# Altium PCB CT9042 Main Board.PcbDoc (part 2 of 2)
Units mm, origin at the board's own origin, x right, y up, seen from the top; angles counter-clockwise.
Board outline 242.29 x 155.23 mm, 4 copper layers (Top Layer, Layer 1, Layer 2, Bottom Layer), stack 1.794 mm thick; 436 components, 347 nets, 1449 pads, 165 vias.
Unrouted connection lines stored in the file: 759.
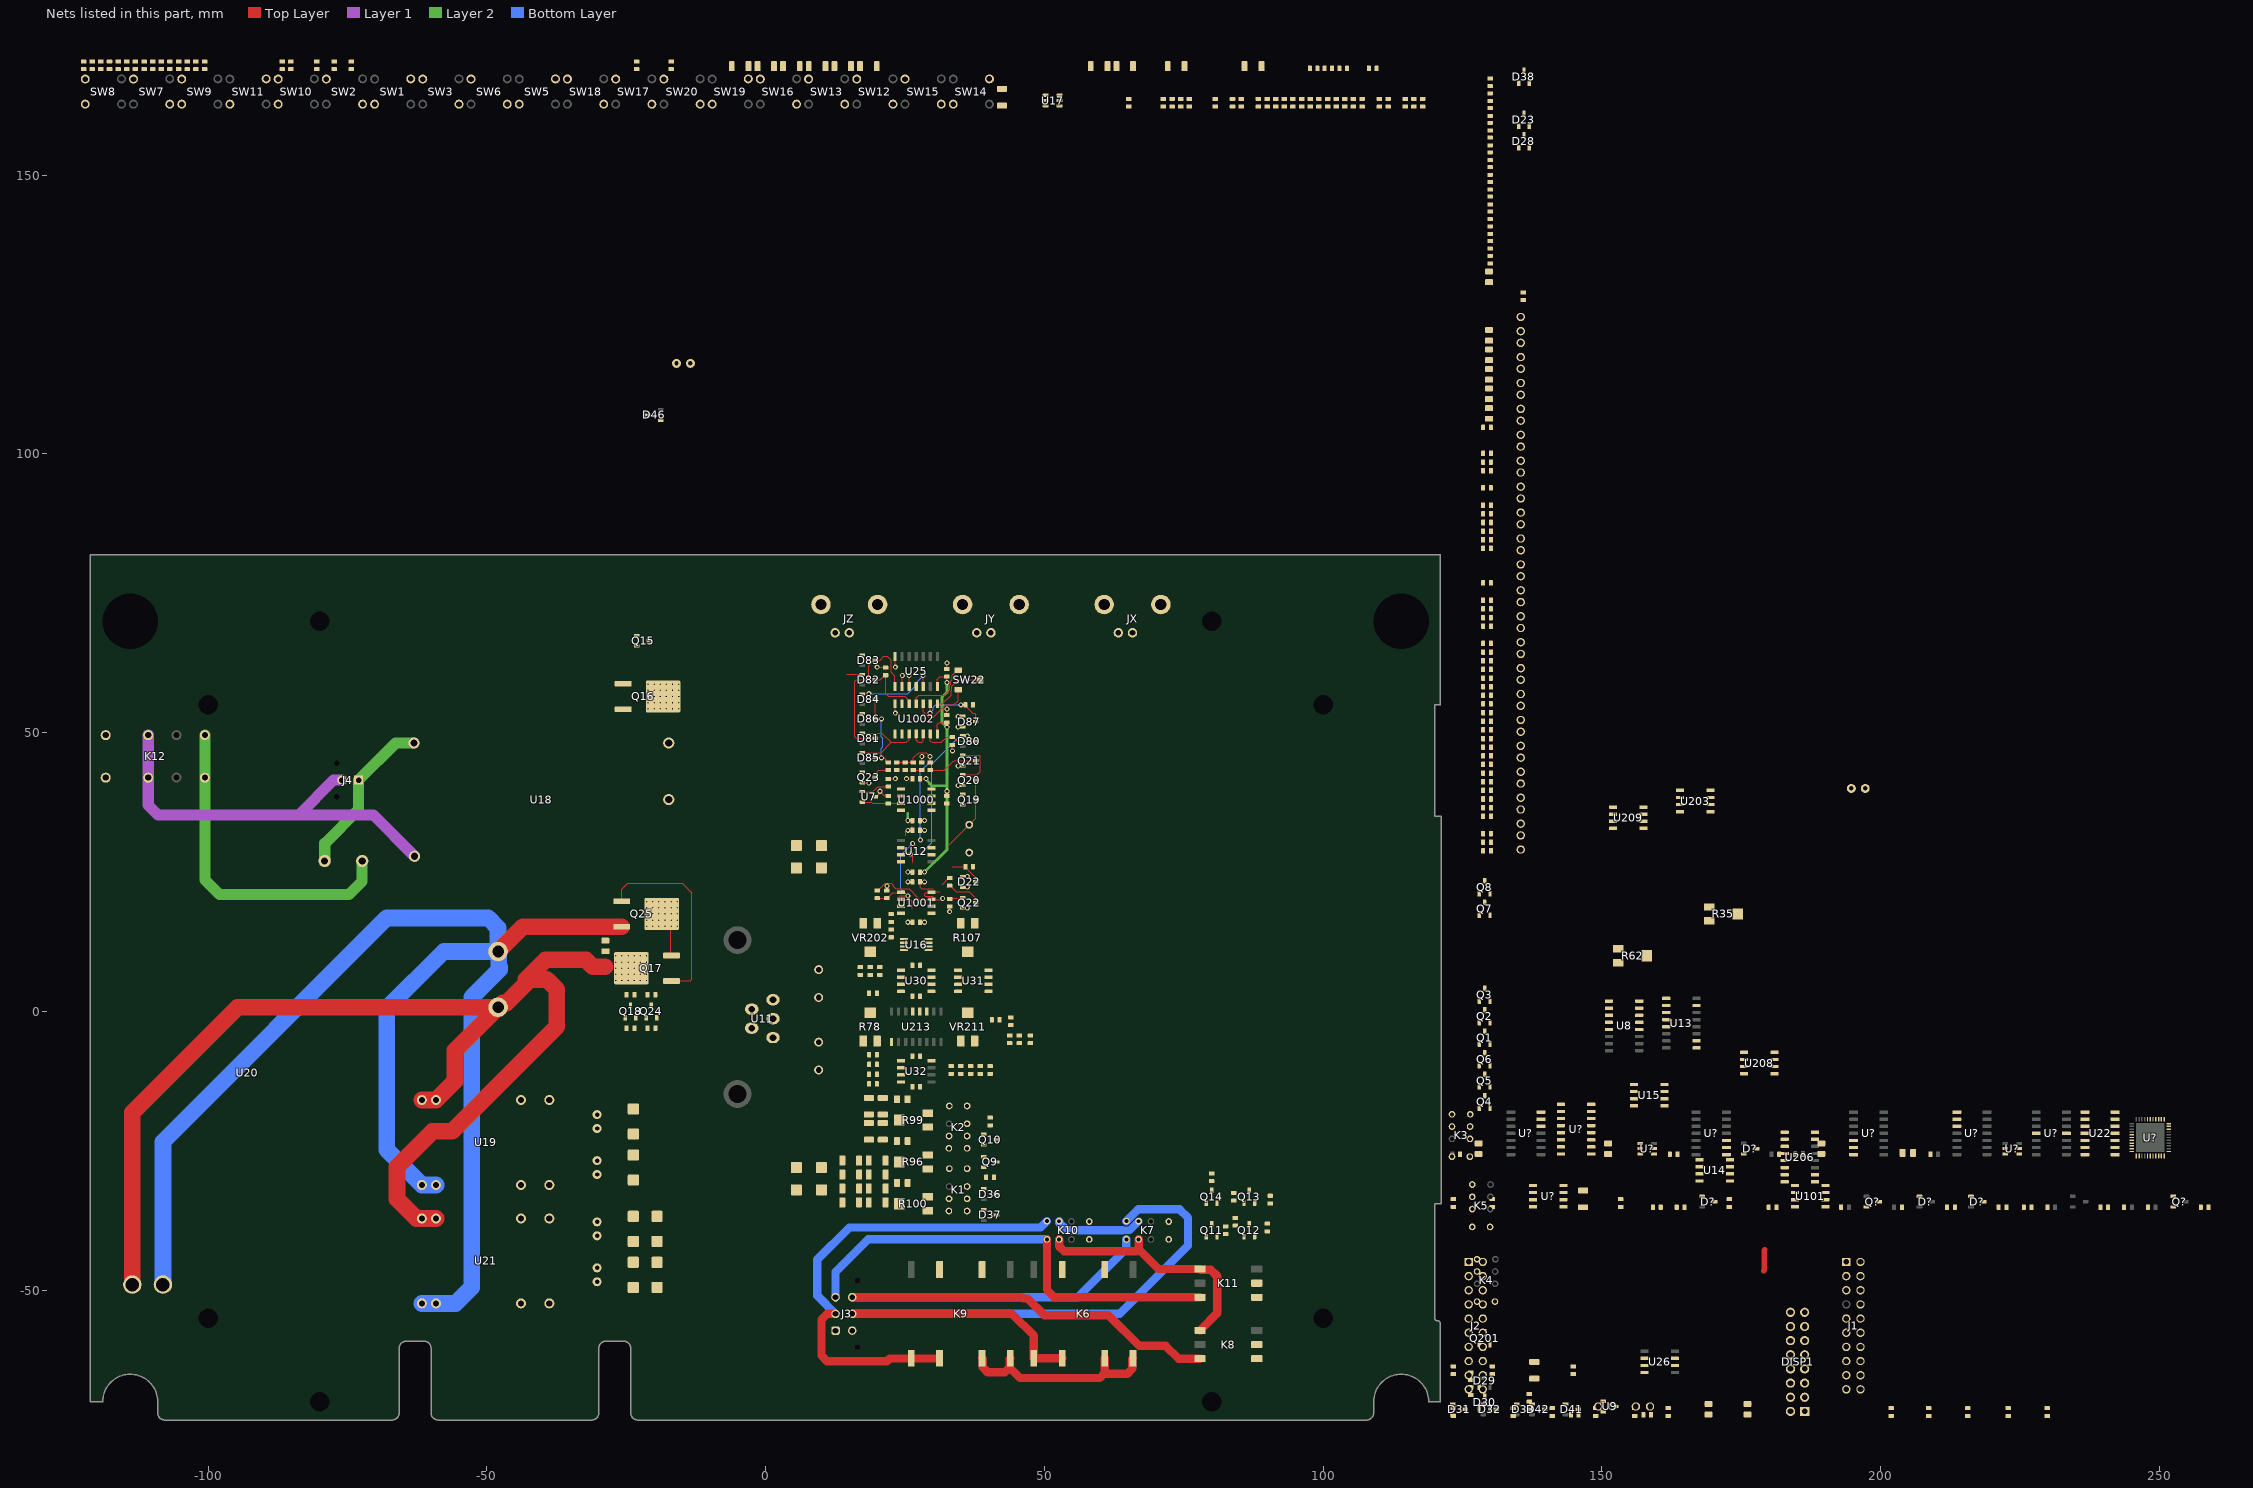
[diagram p4: the nets of this part, all layers, seen from the top]

## Part data (continued)
K8 K11: "RELAY,OPTOMOS,1.5A,100V,AC,IXYS,LCA701S,SMD"
K12: "RELAY,DPDT,5V COIL,250VAC,3A", Manufacturer 1=CIT, Manufacturer Part Number 1=J104B2C5VDC.20S, DIGIKEY=2449-J104B2C5VDC.20S-ND
Q1 Q2 Q4 Q6 Q7 Q8 Q9 Q10 Q11 Q12 Q13 Q14 Q24: library part XSTR-NPN-BC847, "XSTR,NPN,45V,0.1A,,BC847B,SOT23"
Q3 Q5 Q19 Q201 Q? Q?: library part XSTR-PNP-BC857, "XSTR,PNP,SOT23,BC857,SOT23", Manufacturer 1=NEXPERIA, Manufacturer Part Number 1=BC857BW,115, DIGIKEY=1727-4869-1-ND
Q15 Q20 Q21 Q22 Q23: library part XSTR-NMOS-VISHAY-SI2336DS-T1-BE3, "XSTR,NMOS,30V,4.3A,SI2336DS-T1-BE3.SOT23", Manufacturer 1=VISHAY, Manufacturer Part Number 1=SI2336DS-T1-BE3, Package=SOT23, DIGIKEY=742-SI2336DS-T1-BE3CT-ND, Idmax=4.3A, Vds=30V
Q16 Q25: library part XSTR-PMOS-DIODES-DMP10H400SK3-13, "XSTR,PMOS,100V,5.6A,DMP10H400SK3-13,DPAK", Manufacturer 1=DIODES, Manufacturer Part Number 1=DMP10H400SK3-13, Package=DPAK, Idmax=9A, Vds=100V
Q17: library part XSTR-NMOS-DIODES-DMN10H170SK3-13, "XSTR,NMOS,100V,12A,DMN10H170SK3-13,DPAK", Manufacturer 1=DIODES, Manufacturer Part Number 1=DMN10H170SK3-13, Package=DPAK, Idmax=5.6, Vds=100V
Q18: library part XSTR-PNP-BC857, "XSTR,PNP,SOT23,BC857,SOT23"
R1 R2 R3 R4 R5 R29 R30 R157 R158 R159 R160 R164: library part RESC-0603-10K-1%-1/10W, "RESISTOR,10K,1%,100mW,0603 (1608)", LCSC=C25804, Manufacturer 1=YAGEO, Manufacturer Part Number 1=RC0603FR-0710KL, Power=1/10W, Tolerance=1%, MOUSER=603-RC0603FR-0710KL
R6 R162 R163: library part RESC-0805-GENERIC, "RESISTOR,GENERIC,0805"
R7: library part RESC-0603-1K-1%-1/10W, "RESISTOR,1K,1%,100mW,0603 (1608)", LCSC=C21190, Manufacturer 1=YAGEO, Manufacturer Part Number 1=RC0603FR-071KL, Power=1/10W, Tolerance=1%, MOUSER=603-RC0603FR-071KL
R8 R9 R10 R11 R12 R13 R14 R15 R16 R17 R18 R19 R20 R21 R22 R23 R24 R25 R26 R27 R28 R161 R165 R166: library part RESC-0603-470R-1%-1/10W, "RESISTOR,470R,1%,100mW,0603 (1608)", LCSC=C23179, Power=1/10W, Tolerance=1%
R31 R118 R149: library part RESC-0603-511R-0.1%, "RESISTOR,511R,0.1%,100mW,0603 (1608)", Power=1/10W, Tolerance=0.1%
R32 R37 R43 R69 R72 R77 R106 R108: library part RESC-0603-2K05-0.1%-1/10W, "RESISTOR,2K05,0.11%,100mW,0603 (1608)", Power=1/10W, Tolerance=0.1%
R33: library part RESC-0603-50K-0.1%-1/10W, "RESISTOR,50K,0.1%,100mW,0603 (1608)", Power=1/10W, Tolerance=0.1%
R34: library part RESC-0603-2K37-0.1%-1/10W, "RESISTOR,2K37,0.1%,100mW,0603 (1608)", Power=1/10W, Tolerance=0.1%
R35 R62: "RESISTOR,MULTITURN,VERTICAL,5T,500R", Manufacturer 1=BOURNS, Manufacturer Part Number 1=3214X-1-501E
R36 R44 R207: library part RESC-1206-1K-0.1%-1/2W, "RESISTOR,1K,1206,0.1%,520mW,1206", Manufacturer 1=VISHAY, Manufacturer Part Number 1=TNPW12061K00BEEA, Power=0.52W, Tolerance=0.1%
R38 R45 R314: library part RESC-0603-1K27-0.1%-1/10W, "RESISTOR,1K27,0.1%,100mW,0603 (1608)", Power=1/10W, Tolerance=0.1%
R39 R42 R51 R58 R60 R61 R67 R68 R70 R71 R76 R101 R102 R110 R138 R139 R140 R141 R142 R144 R145 R146 R147 R148 R154 R155 R242 R243: library part RESC-0603-10K-0.1%-1/10W, "RESISTOR,10K,0.1%,100mW,0603 (1608)", Manufacturer 1=PANASONIC, Manufacturer Part Number 1=ERA-3AEB103V, Power=1/10W, Tolerance=0.1%, DIGIKEY=P10KDBCT-ND
R40 R112: library part RESC-0603-9K09-0.1%-1/10W, "RESISTOR,9K09,0.1%,100mW,0603 (1608)", Power=1/10W, Tolerance=0.1%
R41 R119 R122 R126 R128: library part RESC-0603-511R-0.1%-1/10W, "RESISTOR,511R,0.1%,100mW,0603 (1608)", Power=1/10W, Tolerance=0.1%
R46 R74 R75 R111 R114: library part RESC-0603-2K49-0.1%-1/10W, "RESISTOR,2K49,0.1%,100mW,0603 (1608)", Power=1/10W, Tolerance=0.1%
R47 R52: library part RESC-1206-18K-0.1%-1/2W, "RESISTOR,18K,1206,0.1%,520mW,1206", Manufacturer 1=VISHAY, Manufacturer Part Number 1=TNPW1206220RBEEA, Power=0.52W, Tolerance=0.1%
R48 R53 R82 R87: library part RESC-1206-1K8-0.1%-1/2W, "RESISTOR,1K8,1206,0.1%,520mW,1206", Manufacturer 1=VISHAY, Manufacturer Part Number 1=TNPW12061K80BEEA, Power=0.52W, Tolerance=0.1%
R49 R54: library part RESC-1206-200R-0.1%-1/2W, "RESISTOR,200R,1206,0.1%,520mW,1206", Manufacturer 1=VISHAY, Manufacturer Part Number 1=TNPW1206200RBEEA, Power=0.52W, Tolerance=0.1%
R50 R55 R81 R86 R113 R115: library part RESC-0603-2K21-0.1%-1/10W, "RESISTOR,2K21,0.1%,100mW,0603 (1608)", Power=1/10W, Tolerance=0.1%
R56 R57: library part RESC-1206-220R-0.1%-1/2W, "RESISTOR,220R,1206,0.1%,520mW,1206", Manufacturer 1=VISHAY, Manufacturer Part Number 1=TNPW1206220RBEEA, Power=0.52W, Tolerance=0.1%
R59 R66 R73 R121 R123 R129 R130 R135 R257: library part RESC-0603-1K-0.1%-1/10W, "RESISTOR,1K,0.1%,100mW,0603 (1608)", Power=1/10W, Tolerance=0.1%
R63 R79 R316: library part RESC-0603-2M74-0.1%-1/10W, "RESISTOR,2M74,0.1%,100mW,0603 (1608)", Power=1/10W, Tolerance=0.1%
R64 R117 R241 R271: library part RESC-0603-4M75-1%-1/10W, "RESISTOR,4M75,0.1%,100mW,0603 (1608)", Power=1/10W, Tolerance=0.1%
R65: library part RESC-0603-4K42-0.1%-1/10W, "RESISTOR,4K42,0.1%,100mW,0603 (1608)", Power=1/10W, Tolerance=0.1
R78 R107 VR211: "RESISTOR,MULTITURN,VERTICAL,5T,10K", Manufacturer 1=BOURNS, Manufacturer Part Number 1=3214X-1-102E
R80 R103: library part RESC-0603-44K2-0.1%-1/10W, "RESISTOR,44K2,0.1%,100mW,0603 (1608)", Power=1/10W, Tolerance=0.1%
R83 R88: library part RESC-1206-180R-0.1%-1/2W, "RESISTOR,180,1206,0.1%,520mW,1206", Manufacturer 1=VISHAY, Manufacturer Part Number 1=TNPW1206180RBEEA, Power=0.52W, Tolerance=0.1%
R84 R85 R89 R90 R91 R92 R97 R98: library part RESC-1206-20R-0.1%-1/2W, "RESISTOR,20R,1206,0.1%,520mW,1206", Manufacturer 1=VISHAY, Manufacturer Part Number 1=TNPW120620R0BEEA, Power=0.52W, Tolerance=0.1%
R93: library part RESC-0805-2K49-0.1%-1/4W, "RESISTOR,2K49,0.1%,250mW,0805", Manufacturer 1=TE, Manufacturer Part Number 1=RP73PF2A2K49BTDF, Power=1/4W, Tolerance=0.1%
R94 R95: library part RESC-0805-1K54-0.1%-1/4W, "RESISTOR,1K54,0.1%,250mW,0805", Manufacturer 1=TE, Manufacturer Part Number 1=RP73PF2A1K54BTDF, Power=1/4W, Tolerance=0.1%
R96 R99 R100: "RESISTOR,MULTITURN,VERTICAL,5T,1K", Manufacturer 1=BOURNS, Manufacturer Part Number 1=3214X-1-102E
R104: library part RESC-0603-511K-0.1%-1/10W, "RESISTOR,511K,0.1%,100mW,0603 (1608)", Power=1/10W, Tolerance=0.1%
R105: library part RESC-0603-1M54-0.1%-1/10W, "RESISTOR,1M54,0.1%,100mW,0603 (1608)", Power=1/10W, Tolerance=0.1
R109: library part RESC-0603-1K01-0.1%-1/10W, "RESISTOR,1K01,0.1%,100mW,0603 (1608)", Power=1/10W, Tolerance=0.1%
R116 R270: library part RESC-0603-100K-0.1%-1/10W, "RESISTOR,100K,0.1%,100mW,0603 (1608)", Power=1/10W, Tolerance=0.1%
R120 R124 R125 R127 R131 R132 R133 R151 R152 R153 R156 R277 R279 R280 R? R? R? R? R? R? R? R? R? R? R? R?: library part RESC-0603-10K-0.1%-1/10W, "RESISTOR,10K,0.1%,100mW,0603 (1608)", Power=1/10W, Tolerance=0.1%
R134 R136: library part RESC-0603-51K1-1%-1/10W, "RESISTOR,51K1,1%,100mW,0603 (1608)", Power=1/10W, Tolerance=1%
R137 R150: library part RESC-1206-1K-0.1%-1/4W, "RESISTOR,1K,1206,0.1%,125mW,1206", Power=1/4W, Tolerance=0.1%
R143: library part RESC-0603-10R-1%-1/10W, "RESISTOR,10R,1%,100mW,0603 (1608)", Power=1/10W, Tolerance=1%
R261: library part RESC-0603-42K2-0.1%-1/10W, "RESISTOR,42K2,0.1%,100mW,0603 (1608)", Power=1/10W, Tolerance=0.1%
SW1 SW2 SW3 SW5 SW6 SW7 SW8 SW9 SW10 SW11 SW12 SW13 SW14 SW15 SW16 SW17 SW18 SW19 SW20: "SW,SMD,TACT,4PIN,TH,160g TOP ACTUATOR FOR CAP,E-SWITCH,TL1105SPF160", Manufacturer 1=E-SWITCH, Manufacturer Part Number 1=TL1105SPF160Q, DIGIKEY=EG1861-ND
SW22: library part SWITCH-NIDEC-CJS-1200TB1, "SWITCH,SPST,SLIDE,SMD", Manufacturer 1=NIDEC, Manufacturer Part Number 1=CJS-1200TB1, DIGIKEY=563-CJS-1200TB1CT-ND
U7 U9: library part IC-TI-ATL431B-SOT23, "IC,REGULATOR,REFERENCE,SHUNT,0.5%,48ppm,TL431,SOT23", Manufacturer 1=TI, Manufacturer Part Number 1=ATL431BIDBZR, DIGIKEY=296-47739-1-ND
U8: library part IC-SILICONIX-DG451, "IC,ANALOG,4XSPST ANALOG SWITCH,NC,,SILICONIX,DG451,SO16", Manufacturer 1="VISHAY SILICONIX", Manufacturer Part Number 1=DG451EY-T1-E3, DIGIKEY=DG451EY-T1-E3CT-ND
U11: library part IC-TI-LM675-TO220-5, "IC,OPAMP,SINGLE,POWER,LM675,TO220-5"
U12: library part IC-TI-TLV7211-SO8, "IC,COMPARATOR,SINGLE,PUSHPULL,TI,TLV7211,SO8", Manufacturer 1=TI, Manufacturer Part Number 1=TLV7211IDR, DIGIKEY=296-21871-1-ND
U13 U206 U213: library part IC-TI-CD4053-SPLIT, "IC,LOGIC,CMOS,4XXX,TRIPLE 2:1 MUX,SPLIT BLOCKS"
U14: library part IC-TI-LM393-SO8, "IC,COMPARATOR,DUAL,LM393,SO8", Manufacturer 1=DIODES-INC, Manufacturer Part Number 1=AS393AMTR-E1, DIGIKEY=AS393AMTR-E1
U15: library part IC-ANALOG-AD633XR-SO8, "IC,ANALOG,MULTIPLIER,ANALOGDEVICES,AD633JRZ,SO8", Manufacturer 1="ANALOG DEVICES", Manufacturer Part Number 1=AD633JRZ, DIGIKEY=505-AD633JRZ-ND
U16: library part IC-MICROCHIP-MCP4551T-103, "IC,DIGITAL POTMETER,257STEP,I2C,10K,MICROCHIP,MCP4551T-103", Manufacturer 1=MICROCHIP, Manufacturer Part Number 1=MCP4551T-103E/MS, DIGIKEY=MCP4551T-103E/MSCT-ND
U17: library part IC-TI-74HC14-SO14, "IC,NOT,HEX,SCHMITTTRIGGER,ONSEMI,MC74AC14DR2G,SO14", Manufacturer 1=ONSEMI, Manufacturer Part Number 1=MC74AC14DR2G, DIGIKEY=MC74AC14DR2GOSCT-ND
U18: library part MODULE-ADAMTECH-AC005-S05, "MOD,AC/DC,ISO,90...264 AC,+5V OUT,1A"
U19: library part MODULE-MEANWELL-DWN06C-05, "MOD,DC/DC,ISO,DC 36...72V IN,+/-5V OUT,1A"
U20: library part MODULE-MEANWELL-IRM-45-48, "MOD,AC/DC,ISO,90...264 AC,+48V OUT,1A"
U21: library part MODULE-MEANWELL-DWN06C-15, "MOD,DC/DC,ISO,DC 36...72V IN,+/-15V OUT,200mA"
U22: library part IC-TI-CD4066-SO14, "IC,ANALOG,4XSPST ANALOG SWITCH,NO,TI,CD4016,SO14", Manufacturer 1=TI, Manufacturer Part Number 1=CD4066BM96, DIGIKEY=296-14475-1-ND
U25: library part IC-TI-CD4013-SO14, "IC,LOGIC,CMOS,4XXX,DUAL D-FLIPFLOP,CD4013", Manufacturer 1=TI, Manufacturer Part Number 1=CD4013BM96, DIGIKEY=296-24347-1-ND
U26: library part IC-TI-TL081-SO8, "IC,OPAMP JFET,SINGLE,TL081HIDR,SO8", Manufacturer 1=TI, Manufacturer Part Number 1=TL081HIDR, MOUSER=595-TL081HIDR
U30 U31 U32 U101 U1000 U1001: library part IC-TI-TL082H-SO8, "IC,OPAMP JFET,DUAL,TL082HIDR,SO8", Manufacturer 1=TI, Manufacturer Part Number 1=TL082HIDR, MOUSER=595-TL082HIDR
U203 U208 U209: library part IC-TI-LF412-S08, "IC,OPAMP JFET,DUAL,LF412,SO8"
U1002: library part IC-DIODES-74LVC14AS14-13-SO14, "IC,LOGIC,CMOS,74XX,HEX SCHMITTTRIGGER,74LVC14AS14-13,SO14", Manufacturer 1=DIODES, Manufacturer Part Number 1=74LVC14AS14-13, DIGIKEY=74LVC14AS14-13DICT-ND
U?: library part IC-WCH-CH340B, "IC,XCVR,USB UART WITH XTAL AND EEPROM,WCH,CH340G-SO16", Manufacturer 1=WCH, Manufacturer Part Number 1=FT231XS-R, MOUSER=CH340B
U? U? U? U? U?: library part IC-TI-TL084-SO14, "IC,OPAMP JFET,QUAD,TL084HIDR,SO14", Manufacturer 1=TI, Manufacturer Part Number 1=TL082HIDR, MOUSER=595-TL082HIDR
U? U?: library part IC-TI-SN74LVC1G3157DBVR, "IC,ANALOG,SPDT ANALOG SWITCH,SINGLEGATE,TI,SN74LVC1G3157DBVR,SOT23-6", Manufacturer 1=TI, Manufacturer Part Number 1=SN74LVC1G3157DBVR, DIGIKEY=296-14908-1-ND
U?: library part IC-SILICONIX-DG470EY-T1-E3-SO8, "IC,ANALOG,SPDT ANALOG SWITCH,SILICONIX,DG470EY-T1-E3,SO8", Manufacturer 1=VSHIAY, Manufacturer Part Number 1=DG470EY-T1-E3, DIGIKEY=DG470EY-T1-E3CT-ND
U?: library part IC-ATMEL-ATMEGA4809-QFP48, "IC,CPU,ATMEGA4809,QFP48"
VR202: "RESISTOR,MULTITURN,VERTICAL,5T,100K", Manufacturer 1=BOURNS, Manufacturer Part Number 1=3214X-1-102E

## Free pads (board coordinates)
  round 0 hole 10 unplated: 1(-114,70) 1(114,70)
  round 0 hole 3.5 unplated: 1(-100,55) 1(-100,-55) 1(-80,70) 1(-80,-70) 1(80,70) 1(80,-70) 1(100,55) 1(100,-55)

## Via types
v1: diameter 0.508/0.508/0.508/0.6 (per signal layer), hole 0.254, Top Layer to Bottom Layer, 90 vias
v2: diameter 0.9, hole 0.5, Top Layer to Bottom Layer, tented top, 50 vias
v3: diameter 0.5, hole 0.2, Top Layer to Bottom Layer, 25 vias

## Nets (pads, with @x,y where several pads share a name; then routed paths per layer and width w, separated by ;. In a path a pad name is that pad's centre, name@x,y a point inside that pad or via, vN(x,y) a via of type N, cw(c..) or ccw(c..) an arc to the next point about the centre after c; other vN are vias at no path point)
A\/B: U17.3
ADC-D0: U?.19
ADC-D1: U?.18
ADC-D2: U?.17
ADC-D3: U?.16@247.869,-25.915
ADC-D4: U?.13@246.369,-25.915
ADC-D5: U?.12@245.869,-25.915
ADC-D6: U?.11@245.069,-25.115
ADC-D7: U206.9 U?.10@245.069,-24.615
ADC-IBG: D29.3 R59.1
ADC-ICD: U13.4 U14.6 U15.1 U101.3
ADC-VBG: R73.1 R76.1
ADC-VCD: R243.1 U15.7 U30.1 U30.3 U213.3
AGND: C26.2 C28.1 C33.2 C38.2 C42.2 C44.2 C47.1 C48.2 C52.1 C56.2 C60.1 C68.2 C69.2 C70.2 C71.1 C72.2 C73.2 C74.2 C75.2 C76.1 C77.2 C78.2 C79.2 C80.1 C81.2 C83.1 C84.1 D60.2 D63.1 D70.2 D73.1 D87.1 J3.1 J3.4 JX.2 JX.3 JX.4 JY.2 JY.3 JY.4 JZ.2 JZ.3 JZ.4 K5.7 Q3.3 Q4.3 Q11.2 Q12.2 Q13.2 Q14.2 Q15.2 Q17.3 Q20.2 Q21.2 Q22.2 Q23.2 Q25.4 R63.2 R64.2 R76.2 R110.2 R112.2 R120.1 R124.2 R131.2 R140.2 R144.2 R145.2 R147.1 R153.2 R280.2 R?.1@159.179,-35.115 R?.1@163.429,-35.115 R?.1@229.929,-35.115 R?.1@247.929,-35.115 U7.3 U8.3 U8.14 U13.2 U15.2 U15.8 U16.1 U16.4 U16.7 U18.4 U19.9 U19.16 U21.9 U21.16 U25.7 U25.9 U25.10 U31.3 U31.5 U208.3 U208.5 U209.5 U1002.7 U?.3@137.644,-33.75 | length 36
  Top Layer w0.2: Q25.4@-18.66,17.495 -17.067,15.902 -17.067,10.192 Q17.3@-16.91,10.035 ; Q23.2@17.35,41.05 17.375,41.025 18.475,41.025 v2(18.5,41) ; U7.3@19.65,38.5 19.85,38.5 20.366,39.016 20.366,39.366 v2(20.5,39.5) 21.31,38.69 C33.2@22,38.69 ; v2(20,61.75) 20.03,61.72 21.47,61.72 R145.2@21.5,61.69 ; R110.2@21.75,21.69 v2(21.75,22.5) ; U1002.7@23.19,55.2 23.22,55.17 23.22,53.53 v2(23.25,53.5) ; U25.7@23.19,63.7 23.22,63.67 23.22,61.78 v2(23.25,61.75) ; U25.9@24.46,58.3 24.48,58.32 24.48,60.23 v2(24.5,60.25) ; v2(25.25,41.75) C77.2@26.31,41.75 ; v2(25.5,23.25) C74.2@26.31,23.25 ; v2(25.5,25) C73.2@26.31,25 ; U25.10@25.73,58.3 25.74,58.31 25.74,60.24 v2(25.75,60.25) ; C76.1@27.69,16 v2(28.5,16) ; C75.2@27.69,32.5 v2(28.5,32.5) ; C80.1@27.69,34.25 v2(28.5,34.25) ; R144.2@28,44.69 v2(28,45.75) ; C79.2@32.5,53.19 v2(32.5,54.25) ; C78.2@32.5,61.44 v2(32.5,62.5) ; v2(33,17.89) R147.1@33,18.7 ; v2(33.5,46.75) R140.2@33.5,47.81 ; v2(34.54,40.55) Q20.2@35.35,40.55 ; v2(34.54,44.05) Q21.2@35.35,44.05 ; v2(34.54,52.95) D87.1@35.35,52.95 ; Q22.2@35.35,18.55 v2(36.16,18.55)
  other v1: -21.365,15.295 -20.265,15.295 -19.165,15.295 -18.065,15.295 -16.965,15.295 -15.865,15.295 -21.365,16.395 -20.265,16.395 -19.165,16.395 -18.065,16.395 -16.965,16.395 -15.865,16.395 -21.365,17.495 -20.265,17.495 -19.165,17.495 -18.065,17.495 -16.965,17.495 -15.865,17.495 -21.365,18.595 -20.265,18.595 -19.165,18.595 -18.065,18.595 -16.965,18.595 -15.865,18.595 -21.365,19.695 -20.265,19.695 -19.165,19.695 -18.065,19.695 -16.965,19.695 -15.865,19.695
ANA-IB: U22.2
ANA-IC: U22.9
ANA-VB: U22.3
ANA-VC: U22.10
BEAMFIND: Q23.1
BFA: R69.1 U8.1 U8.16
BLANK: JZ.1 R149.2
BTN-ALTERNATE: SW11.1
BTN-BIPFET: SW7.3
BTN-CHA: SW5.1
BTN-CHB: SW6.2
BTN-DUTAB: SW20.3
BTN-IMAXDN: SW15.2
BTN-IMAXUP: SW8.1
BTN-MARK12: SW2.3
BTN-NPN-PNP: SW12.3
BTN-PAGE: SW1.1
BTN-PMAXDN: SW17.2
BTN-PMAXUP: SW10.1
BTN-ROTCLICK: R164.1
BTN-RUNSTOP: SW18.2
BTN-SETUP: SW14.4
BTN-TRCNT: SW13.3
BTN-TRSEL: SW19.1
BTN-VMAXDN: SW9.1 SW16.2
DISCHARGE: D81.3 D83.3 Q20.1 Q21.1 U25.8 | length 38.1
  Top Layer w0.2: D81.3@19.65,49 16.25,49 16,49.25 16,59.25 16.25,59.5 18.25,59.5 18.5,59.75 18.5,62.05 19.45,63 20.51,63 21.21,63.7 21.79,63.7 22.5,62.99 22.5,60.845 23.19,60.155 U25.8@23.19,58.3 ; Q20.1@35.35,42.45 37.95,42.45 38.5,43 38.5,45.75 38.3,45.95 Q21.1@35.35,45.95
DRIVE: U16.6 U30.2
ENABLE: U17.5
F-KEYINT-A: J1.8 R159.1
F-KEYINT-B: J1.10 R160.1
F-LCD4: DISP1.11 J1.11
F-LCD5: DISP1.12 J1.13
F-LCD6: DISP1.13 J1.15
F-LCD7: DISP1.14 J1.17
F-LCDE: DISP1.6 J1.9
F-LCDRS: DISP1.4 J1.5
F-POWERON: J1.3 SW3.3
F-SCL: J1.4 R29.1
F-SDA: J1.6 R30.1
FGND: C1.2 C2.2 C3.2 C4.2 C5.2 C6.2 C7.2 C8.2 C9.2 DISP1.1 DISP1.5 J1.19 J1.20 Q1.2 R3.2 R5.2 R157.2 R158.2 R161.1 SW1.4 SW2.2 SW3.2 SW5.4 SW6.3 SW7.2 SW8.3 SW9.3 SW10.3 SW11.4 SW12.2 SW13.2 SW14.1 SW15.3 SW16.3 SW17.3 SW18.3 SW19.4 SW20.2
FP5VD: C1.1 C2.1 C3.1 C4.1 C5.1 C6.1 C7.1 C8.1 C9.1 D1.2 D2.2 D3.2 D4.2 D5.2 D6.2 D7.2 D8.2 D9.2 D10.2 D11.2 D12.2 D13.2 D14.2 D15.2 D16.2 D17.2 D18.2 D19.2 D20.2 D21.2 D40.2 D47.2 DISP1.2 DISP1.15 J1.1 J1.2 R1.2 R2.2 R4.2 R29.2 R30.2 R159.2 R160.2 R164.2
GND: C10.2 C11.2 C12.2 C13.2 C14.2 C15.1 C16.1 C17.1 C18.1 C19.1 C20.1 C21.2 C22.1 C23.1 C24.2 C25.1 C29.2 C30.1 C31.2 C32.2 C36.2 C37.1 C41.2 C43.2 C45.2 C46.2 C?.1@225.679,-35.115 C?.2@163.559,-25.615 C?.2@213.309,-35.115 C?.2@240.809,-35.115 D29.1 D?.3@177.769,-24.615 J2.19 J2.20 Q6.2 Q7.2 Q8.2 Q9.2 Q10.2 R39.1 R45.2 R46.2 R?.2@124.559,-25.615 U11.1 U22.7 U30.5 U206.6 U206.8 U?.2@156.869,-24.615 U?.2@222.369,-24.615
IB1: R77.1
IB2: R72.1
IB/VG: K3.5 K4.5 K5.5 R47.2 R52.2 R56.2 R57.2 R66.1
IBPOL: U206.10
IBVG: K7.6 K8.4 K10.6 K11.4 | length 44.9
  Top Layer w1.5: K10.6@52.65,-40.888 52.65,-42.121 53.522,-42.994 66.556,-42.994 66.9,-42.65 ; K7.6@66.9,-40.888 66.9,-42.65 ; K8.4@77.92,-57.21 78.071,-57.21 78.186,-57.095 78.186,-56.944 81,-54.13 81,-47.5 79.825,-46.325 78.035,-46.325 K11.4@77.92,-46.21 70.46,-46.21 66.9,-42.65
ILIMIT: U?.8@142.644,-25.56
IRANGE3: R106.1
IRANGE4: R108.1
KEEPON: Q15.1 R120.2
KEYINT-A: J2.8
KEYINT-B: J2.10
KEYINTA: U?.5@245.069,-22.115
KEYINTB: U?.4@245.069,-21.615
L: J4.2 K12.2 K12.7 U18.2 | length 74.4
  Layer 1 w2: K12.7@-110.77,49.56 K12.2@-110.77,41.94 -110.77,37.02 -109,35.25 -83.75,35.25 ; J4.2@-76.025,41.499 -77.501,41.499 -83.75,35.25 ; U18.2@-62.985,27.84 -70.395,35.25 -83.75,35.25
LCD-D4: J2.11 U?.34
LCD-D5: J2.13 U?.35
LCD-D6: J2.15 U?.36
LCD-D7: J2.17 U?.37
LCD-E: J2.9 U?.38
LCD-RS: J2.5 U?.40
LCD-RW: J2.7 U?.39
LED-2mA: R18.2
LED-20mA: R19.2
LED-200mA: R20.2
LED-ALT: R28.2
LED-BACKLIGHT: R7.2
LED-BIP: R12.2
LED-CHA: R16.2
LED-CHB: R17.2
LED-FET: R15.2
LED-ILIMIT: J1.12 R165.2
LED-MRK-1: R8.2
LED-MRK-2: R11.2
LED-MRK-A: R9.2
LED-MRK-B: R10.2
LED-NPN: R14.2
LED-PLIMIT: J1.14 R166.2
LED-PMAX4W: R26.2
LED-PMAX40mW: R24.2
LED-PMAX400mW: R25.2
LED-PNP: R13.2
LED-RUNSTOP: R27.2
LED-VMAX2V: R21.2
LED-VMAX10V: R22.2
LED-VMAX40V: R23.2
LEDILIMIT: J2.12
LEDPLIMIT: J2.14
MARKER: U?.6@143.094,-33.75 U?.31
MARKERENABLE: U?.5@143.094,-35.02 U?.32
N: J4.1 U18.1 U20.1 | length 29.7
  Layer 2 w2: U20.1@-79.125,27 -79.087,27.038 -79.087,30.163 -73.025,36.225 J4.1@-73.025,41.499 -66.364,48.16 U18.1@-63.11,48.16
N5VA: C15.2 C16.2 C25.2 C30.2 C52.2 C71.2 C75.1 C80.2 C83.2 C84.2 C?.2@227.059,-35.115 D34.1 D63.2 D67.1 R43.2 R78.1 R104.2 R107.1 R156.2 U8.5 U12.4 U14.4 U19.11 U26.4 U30.4 U31.4 U32.4 U206.7 U208.8 U1000.4 U?.4@227.919,-21.865 U?.7@143.094,-32.48 VR202.1 VR211.1 | length 8
  Top Layer w0.2: 25.095,31.475 25.095,32.345 25.25,32.5 v2@25.695,32.5 ; v2(25.5,34.25) C80.2@26.31,34.25 ; 26.31,33.25 26.31,33.115 ; v2(25.5,32.5) v2@25.695,32.5 ; v2(25.5,32.5) v2@25.695,32.5 ; v2(25.5,32.5) C75.1@26.31,32.5 ; v2@25.695,32.5 C75.1@26.31,32.5 ; v2@25.695,32.5 C75.1@26.31,32.5 ; v2@25.695,32.5 26.31,33.115 ; 26.31,33.115 26.07,32.875 26.31,33.115
  Layer 2 w0.5: v2@25.5,34 25.5,35.5
N15VA: C17.2 C18.2 C19.2 C22.2 C32.1 C37.2 C60.2 C76.2 D22.1 D23.1 D28.1 D30.1 D38.1 D67.2 D73.2 Q5.3 Q24.2 R44.1 R136.2 U8.4 U15.3 U21.11 U101.4 U203.4 U209.8 U1001.4 | length 9.2
  Top Layer w0.2: 23.95,20.025 25.975,20.025 26.31,19.69 26.31,18.5 ; v2(25.5,16) C76.2@26.31,16 ; D22.1@35.35,24.2 v2(36.16,24.2)
  Top Layer w1: 179,-46.5 179.125,-46.375 179.125,-42.875 179.25,-42.75
N48V: C39.2 C40.2 D35.1 Q25.3 U19.2 U19.3 U20.4 U21.2 U21.3 | length 264.9
  Top Layer w3: C40.2@-48,10.75 -43.535,15.215 Q25.3@-25.84,15.215
  Bottom Layer w3: U20.4@-108.125,-49 -108.125,-23.375 -68,16.75 -49.757,16.75 -48,14.993 C40.2@-48,10.75 ; U21.2@-61.68,-52.37 U21.3@-59.14,-52.37 -55.62,-52.37 -52.75,-49.5 -52.75,2.5 -47.75,7.5 -47.75,8 -47.904,8.154 -47.904,10.654 C40.2@-48,10.75 ; U19.3@-59.14,-31.12 U19.2@-61.68,-31.12 -68,-24.8 -68,0.5 -57.75,10.75 C40.2@-48,10.75
NetC21_1: C21.1
NetC23_2: C23.2 R50.2 R55.1
NetC26_1: C26.1 D215.1 D231.1 U11.5
NetC27_1: C27.1 R81.2
NetC28_2: C28.2 D34.2 D35.2 U11.3
NetC33_1: C33.1 R32.2 U7.1 U7.2 U1000.3 | length 13
  Top Layer w0.2: 21.5,37.31 19.19,37.31 18.95,37.55 U7.2@17.35,37.55 U7.1@17.35,39.45 19.2,39.45 20.06,40.31 21.5,40.31 ; C33.1@22,37.31 22.81,37.31 22.865,37.365 U1000.3@24.275,37.365
NetC34_1: C34.1 R116.2
NetC34_2: C34.2 R115.1 R117.2 U14.5
NetC35_1: C35.1 R127.1 R151.1 U101.5
NetC35_2: C35.2 R151.2 U26.2 U26.6
NetC41_1: C41.1 U22.1 U?.3@213.669,-20.595
NetC42_1: C42.1 D42.1 D46.1 Q16.1 R125.2
NetC43_1: C43.1 U22.4 U?.5@195.169,-23.135
NetC45_1: C45.1 U22.8 U?.10@172.319,-23.135
NetC46_1: C46.1 U22.11 U?.12@139.069,-20.595
NetC47_2: C47.2 R137.2 R150.1 U26.3 U?.1@137.644,-31.21
NetC72_1: C72.1 Q19.3 Q20.3 U12.3 U1001.3 | length 26.7
  Top Layer w0.2: 23.95,20.675 24.025,20.75 v2(25.5,20.75) ; v2(26.365,30.135) 26.75,29.75 ; 32.75,29.75 C72.1@36.5,33.5 37.65,34.65 Q19.3@37.65,38 Q20.3@37.65,41.5
  Bottom Layer w0.2: v2(25.5,20.75) 24.25,22 24.25,28.02 v2(26.365,30.135)
NetC81_1: C81.1 R257.2 R314.1
NetC217_1: C217.1 R270.2
NetC217_2: C217.2 R113.2 R271.2 U14.3
NetC234_1: C234.1 D23.3 Q201.3 R36.2 U203.2
NetC234_2: C234.2 Q2.1 Q5.1 R41.1 U203.1
NetC?_1: C?.1@162.179,-25.615
NetC?_2: C?.2@181.309,-35.115 D?.3@170.269,-34.115 R?.2@160.559,-35.115
NetD1_1: D1.1 R11.1
NetD2_1: D2.1 R8.1
NetD3_1: D3.1 R16.1
NetD4_1: D4.1 R12.1
NetD5_1: D5.1 R17.1
NetD6_1: D6.1 R15.1
NetD7_1: D7.1 R20.1
NetD8_1: D8.1 R23.1
NetD9_1: D9.1 R26.1
NetD10_1: D10.1 R28.1
NetD11_1: D11.1 R13.1
NetD12_1: D12.1 R14.1
NetD13_1: D13.1 R19.1
NetD14_1: D14.1 R22.1
NetD15_1: D15.1 R25.1
NetD16_1: D16.1 R18.1
NetD17_1: D17.1 R21.1
NetD18_1: D18.1 R24.1
NetD19_1: D19.1 R27.1
NetD20_1: D20.1 R10.1
NetD21_1: D21.1 R9.1
NetD22_3: D22.3 R31.1 U1001.6 U1001.7 | length 10.6
  Top Layer w0.2: 30.05,20.675 28.617,20.675 28.5,20.792 28.5,21.133 28.692,21.325 30.05,21.325 30.175,21.45 31.2,21.45 ; 33.5,26 R31.1@35.81,26 35.81,25.865 37.65,24.025 D22.3@37.65,23.25
NetD24_1: R207.2
NetD24_3: Q2.2 Q5.2 R41.2
NetD25_3: K3.3 R40.1 R49.1 R50.1 R54.1
NetD26_3: R44.2
NetD28_3: D28.3 R51.2 U203.3
NetD30_3: D30.3 R66.2 U209.3
NetD31_1: D31.1 K3.8 Q6.3
NetD32_1: D32.1 K4.8 Q7.3
NetD33_1: D33.1 K5.8 Q8.3
NetD36_1: D36.1 K2.8 Q10.3
NetD37_1: D37.1 K1.8 Q9.3
NetD38_3: D38.3 R118.1 R152.1 U101.7
NetD39_1: Q12.3 R121.1
NetD39_3: Q11.1 R124.1
NetD40_1: D40.1 R165.1
NetD41_1: D41.1 D46.3 K12.8 Q15.3
NetD43_1: Q14.3 R129.1
NetD43_3: Q13.1 R131.1
NetD44_1: K7.8 Q11.3 R119.1 R122.1
NetD45_1: K10.8 Q13.3 R126.1 R128.1
NetD47_1: D47.1 R166.1
NetD80_1: D80.1 U12.6 | length 30
  Top Layer w0.2: v2(26,28.25) 26,28.202 26.365,27.837 26.365,26.775 ; D80.1@35.35,49.45 v2(36.16,49.45)
  Bottom Layer w0.2: v2(26,28.25) 27.75,28.25 29.75,30.25 29.75,44.351 34.899,49.5 36.16,49.5 v2@36.5,49.5
NetD80_3: D80.3 R140.1 U1002.13 | length 10.2
  Top Layer w0.2: U1002.13@29.54,49.8 29.54,48.46 29.75,48.25 31.5,48.25 32.44,49.19 R140.1@33.5,49.19 33.635,49.19 34.325,48.5 D80.3@37.65,48.5
NetD81_1: D81.1 D85.1 U1002.10 | length 16.2
  Top Layer w0.2: D85.1@17.35,46.45 20.7,46.45 22.5,48.25 ; D81.1@17.35,49.95 20.8,49.95 22.5,48.25 ; U1002.10@25.73,49.8 25.73,48.73 25.25,48.25 22.5,48.25
NetD82_3: D82.3 R145.1 U1002.5 | length 10.8
  Top Layer w0.2: D82.3@19.65,59.5 20.555,59.5 21.365,60.31 R145.1@21.5,60.31 21.5,57 22,56.5 24.93,56.5 25.73,55.7 U1002.5@25.73,55.2
NetD83_1: D83.1 D86.1 U1002.6
NetD84_1: D84.1 Q22.1 R147.2 U25.12 | length 17.1
  Top Layer w0.2: D84.1@17.35,56.95 17.375,56.975 18.475,56.975 v2(18.5,57) ; v2(28.25,60.25) 28.26,60.24 28.26,58.31 U25.12@28.27,58.3 ; v2(31.75,20.25) v2@31.78,20.22 ; R147.2@32.97,20.22 R147.2@33,20.19 33.13,20.32 35.22,20.32 Q22.1@35.35,20.45
  Bottom Layer w0.2: v2(18.5,57) 25.5,57 26.808,58.308 26.808,58.808 v2(28.25,60.25)
NetD84_3: D84.3 D85.3 D86.3 R148.2 | length 14.3
  Top Layer w0.2: D85.3@19.65,45.5 v2(20.75,45.5) 21.25,45.5 21.5,45.25 21.5,44.69 ; D84.3@19.65,56 D86.3@19.65,52.5 v2(20.75,52.5)
  Bottom Layer w0.2: v2(20.75,45.5) 20.75,47.245 21,47.495 21,49.05 20.75,49.3 v2(20.75,52.5)
NetD87_3: D87.3 R149.1 U1002.2 | length 12.9
  Top Layer w0.2: v2(29.5,53.5) 29.52,53.52 29.52,55.18 U1002.2@29.54,55.2 ; v2(35,55) R149.1@35.81,55 35.81,54.865 37.175,53.5 37.5,53.5 37.65,53.35 D87.3@37.65,52
  Bottom Layer w0.2: v2(29.5,53.5) 30.092,54.092 30.092,54.542 30.55,55 v2(35,55)
NetD?_1: D?.1@167.969,-33.165 U?.6@142.644,-23.02
NetD?_2: D?.2@175.469,-25.565 U?.5@142.644,-21.75
NetD?_3: D?.3@218.519,-34.115 U?.1@142.644,-16.67
NetDISP1_3: DISP1.3 R4.1 R161.2
NetDISP1_7: DISP1.7 R3.1
NetDISP1_8: DISP1.8 R5.1
NetDISP1_9: DISP1.9 R157.1
NetDISP1_10: DISP1.10 R158.1
NetDISP1_16: DISP1.16 R6.2 R162.2 R163.2
NetJ3_2: J3.2 K9.5 K9.6 K10.4 | length 85.7
  Top Layer w1.5: J3.2@12.53,-54.25 12.526,-54.254 10.996,-54.254 10,-55.25 10,-61.75 11,-62.75 21.75,-62.75 22.25,-62.25 30.5,-62.25
  Bottom Layer w1.5: J3.2@12.53,-54.25 9.25,-50.97 9.25,-44.5 15,-38.75 49.312,-38.75 K10.4@50.45,-37.613
NetJ3_3: J3.3 K10.5 K11.6 | length 82
  Top Layer w1.5: K10.5@50.45,-40.888 50.45,-49.95 51.79,-51.29 K11.6@77.92,-51.29
  Bottom Layer w1.5: J3.3@12.53,-51.25 12.53,-46.72 18.363,-40.888 K10.5@50.45,-40.888
NetJ3_5: J3.5 K6.5 K6.6 K7.4 | length 126.2
  Top Layer w1.5: J3.5@15.53,-54.25 44.193,-54.25 48.11,-58.167 K6.5@48.11,-62.2 K6.6@53.19,-62.2
  Bottom Layer w1.5: J3.5@15.53,-54.25 63.5,-54.25 75.75,-42 75.75,-37 74.25,-35.5 66.813,-35.5 K7.4@64.7,-37.613
NetJ3_6: J3.6 K7.5 K8.6 | length 121.4
  Top Layer w1.5: J3.6@15.53,-51.25 46,-51.25 46.25,-51.5 47,-51.5 50,-54.5 61.534,-54.5 67.034,-60 71.75,-60 74.04,-62.29 K8.6@77.92,-62.29
  Bottom Layer w1.5: J3.6@15.53,-51.25 56,-51.25 64.7,-42.55 K7.5@64.7,-40.888
NetK1_3: K1.3 K2.3 R82.1 R87.1 R93.1 U11.4
NetK1_4: K1.4 R83.2 R84.1 R88.2 R89.1 R91.1 R95.2 R97.1
NetK1_5: K1.5 R100.1 R100.2
NetK1_6: K1.6 K2.7
NetK1_7: K1.7 R99.1 R99.2
NetK2_4: K2.4 R82.2 R83.1 R87.2 R88.1 R94.2
NetK2_5: K2.5 R96.1 R96.2
NetK2_6: K2.6 R261.2
NetK3_2: K3.2 R56.1 R57.1
NetK3_4: K3.4 Q3.2 Q4.2 R36.1 R40.2
NetK3_6: K3.6 R47.1 R48.1 R52.1 R53.1
NetK4_6: K4.6 R48.2 R49.2 R53.2 R54.2
NetK5_6: K5.6 R51.1
NetK6_3: K6.3 R119.2
NetK8_2: K8.2 R122.2
NetK9_3: K9.3 R126.2
NetK11_2: K11.2 R128.2
NetK12_4: K12.4 K12.5 U20.2 | length 59.9
  Layer 2 w2: K12.5@-100.61,49.56 -100.61,23.61 -98,21 -74.75,21 -72.413,23.337 -72.413,26.962 U20.2@-72.375,27
NetQ1_1: Q1.1 R7.1
NetQ1_3: Q1.3 R6.1 R162.1 R163.1
NetQ3_1: Q3.1 R37.2 R42.2
NetQ4_1: Q4.1 R42.1 R43.1
NetQ6_1: Q6.1 R77.2
NetQ7_1: Q7.1 R72.2
NetQ8_1: Q8.1 R69.2
NetQ9_1: Q9.1 R106.2
NetQ10_1: Q10.1 R108.2
NetQ12_1: Q12.1 R123.2
NetQ14_1: Q14.1 R130.2
NetQ17_1: Q17.1 Q25.1 R135.2 | length 34.7
  Top Layer w0.2: Q25.1@-25.84,19.785 -25.84,21.91 -24.75,23 -15,23 -13.25,21.25 -13.25,5.75 -13.535,5.465 Q17.1@-16.41,5.465
NetQ18_2: Q18.2 R134.2
NetQ18_3: Q18.3 Q24.1 R136.1
NetQ19_1: Q19.1 U1000.7
NetQ19_2: Q19.2 R33.2 U1000.6
NetQ21_3: Q21.3 R143.1 | length 8.9
  Top Layer w0.2: R143.1@29.5,43.31 32.06,43.31 33.75,45 Q21.3@37.65,45
NetQ22_3: Q22.3 R146.2 U16.5 | length 7.1
  Top Layer w0.2: 32.605,22.165 32.605,22.3 32.865,22.56 R146.2@33,22.56 33.135,22.56 34.195,21.5 36.5,21.5 37.65,20.35 Q22.3@37.65,19.5
NetQ23_3: Q23.3 R148.1 SW22.2 U1002.3 | length 14.1
  Top Layer w0.2: Q23.3@19.65,42 19.65,42.65 20.31,43.31 21.5,43.31 ; U1002.3@28.27,55.2 28.27,53.74 29.21,52.8 30.06,52.8 32.26,55 33.75,55 34.5,55.75 34.5,57.689 SW22.2@34.55,57.739
NetQ24_3: Q24.3 R133.2 R135.1
NetQ201_1: Q201.1 U203.7
NetQ201_2: Q201.2 R35.3
NetQ?_1: Q?.1@252.469,-33.165 R277.2 R?.1@257.429,-35.115
NetQ?_3: Q?.3@199.769,-34.115 R?.2@164.809,-35.115 U?.11@148.094,-23.02
NetR34_2: R34.2 R35.1
NetR35_2: R35.2 U203.6
NetR38_2: R38.2
NetR39_2: R39.2 U9.3 U203.5
NetR45_1: R45.1
NetR46_1: R46.1
NetR55_2: R55.2 R62.3
NetR58_1: R58.1 R62.2 R64.1 U208.2
NetR58_2: R58.2 R61.1 U206.2 U208.1
NetR59_2: R59.2 U206.15
NetR60_1: R60.1 R61.2 R63.1 U208.6
NetR60_2: R60.2 U206.1 U208.7
NetR62_1: R62.1 R65.2
NetR65_1: R65.1 R67.2 R70.1 U209.7
NetR67_1: R67.1 R68.2 U209.6
NetR68_1: R68.1 R71.1 U209.1 U209.2
NetR70_2: R70.2 R74.1 U206.5
NetR71_2: R71.2 R75.1 U206.3
NetR73_2: R73.2 U206.4
NetR74_2: R74.2 U8.15
NetR75_2: R75.2 U8.2
NetR78_2: R78.2 R79.1
NetR79_2: R79.2 R80.1 R81.1 R86.2 U11.2
NetR84_2: R84.2 R85.1
NetR86_1: R86.1 R257.1 U32.1 U32.2
NetR89_2: R89.2 R90.1
NetR91_2: R91.2 R92.1
NetR93_2: R93.2 R99.3
NetR94_1: R94.1 R96.3
NetR95_1: R95.1 R100.3
NetR97_2: R97.2 R98.1
NetR101_1: R101.1 U13.5 U31.1
NetR101_2: R101.2 R102.1 R104.1 R105.1 U31.2
NetR102_2: R102.2 R103.1 U13.3 U31.7
NetR103_2: R103.2 R261.1 R314.2 R316.2 U31.6
NetR105_2: R105.2 R107.2
NetR109_1: R109.1 R112.1 U13.1
NetR109_2: R109.2 U14.2 U15.5
NetR110_1: R110.1 R138.1 U1001.2 | length 4.4
  Top Layer w0.2: R138.1@20,20.31 R110.1@21.75,20.31 21.885,20.31 22.145,20.57 22.145,20.67 22.8,21.325 23.95,21.325
NetR111_1: R111.1
NetR113_1: R113.1
NetR114_1: R114.1
NetR115_2: R115.2
NetR116_1: R116.1 R117.1 R?.1@192.929,-35.115 U14.7
NetR121_2: R121.2 U17.1 U17.4
NetR123_1: R123.1 R130.1 U17.6
NetR127_2: R127.2 R279.1 U101.1
NetR129_2: R129.2 U17.2
NetR132_2: R132.2 R137.1 U?.8@143.094,-31.21
NetR139_1: R139.1 R141.1 R142.1 R143.2 U12.2 | length 24.4
  Top Layer w0.2: R139.1@23.5,44.69 R141.1@25,44.69 R142.1@26.5,44.69 26.5,45.5 27.45,46.45 28.8,46.45 v2(29.5,45.75) R143.2@29.5,44.69 ; v2@27.635,30.865 v2(27.75,30.75)
  Bottom Layer w0.2: v2(27.75,30.75) 27.75,43.075 29.5,44.825 v2(29.5,45.75)
NetR142_2: R142.2 R144.1 | length 1.5
  Top Layer w0.2: R142.2@26.5,43.31 R144.1@28,43.31
NetR150_2: R150.2 R156.1 U?.2@137.644,-32.48
NetR152_2: R152.2 R153.1 U101.6
NetR241_1: R241.1 VR202.2
NetR241_2: R241.2 R242.1 R243.2 U30.6
NetR242_2: R242.2 U30.7 U213.5
NetR270_1: R270.1 R271.1 R277.1 U14.1
NetR279_2: R279.2 R280.1 U101.2
NetR316_1: R316.1 VR211.2
NetR?_1: R?.1@184.679,-25.615 U?.7@142.644,-24.29
NetR?_2: R?.2@181.809,-25.615 U?.15@148.094,-17.94
NetSW22_1: SW22.1 U1002.4 | length 11.9
  Top Layer w0.2: U1002.4@27,55.2 27,56.25 27.5,56.75 32,56.75 33,57.75 33,58.51 33.2,58.71 33.2,59.2 33.5,59.5 33.5,60.339 34.4,61.239 SW22.1@34.55,61.239
NetSW22_3: SW22.3 U1002.1 | length 10.3
  Top Layer w0.2: U1002.1@30.81,55.2 31.7,55.2 33.25,56.75 33.25,57.505 33.35,57.605 33.35,58.365 34.474,59.489 SW22.3@38.45,59.489
NetU13_15: U13.15 U15.4
NetU25_11: U25.11 U1002.8
NetU32_3: U32.3 U213.4
NetU?_1: U?.1@213.669,-18.055 U?.2@213.669,-19.325 U?.20
NetU?_2: U?.2@142.644,-17.94 U?.4@224.869,-25.565
NetU?_3: U?.3@142.644,-19.21 U?.4@159.369,-25.565
NetU?_6: U?.6@195.169,-24.405 U?.7@195.169,-25.675 U?.21
NetU?_8: U?.8@172.319,-25.675 U?.9@172.319,-24.405 U?.22
NetU?_9: U?.9@148.094,-25.56 U?.14@148.094,-19.21
NetU?_10: U?.10@148.094,-24.29 U?.12@148.094,-21.75 U?.13@148.094,-20.48
NetU?_13: U?.13@139.069,-19.325 U?.14@139.069,-18.055 U?.23
OVERLOAD: D?.1@206.969,-33.165 D?.1@216.219,-33.165 R?.1@221.179,-35.115 U1002.9
P5VA: C10.1 C11.1 C24.1 C29.1 C48.1 C68.1 C69.1 C70.1 C73.1 C77.1 C78.1 C79.1 C?.1@179.929,-35.115 C?.1@211.929,-35.115 C?.1@239.429,-35.115 C?.1@243.679,-35.115 D60.1 D68.2 D87.2 D215.2 Q?.2 R32.1 R33.1 R37.1 R78.3 R107.3 R132.1 R134.1 R154.1 R155.1 R?.2@203.809,-35.115 R?.2@222.559,-35.115 R?.2@258.809,-35.115 U8.12 U12.7 U14.8 U16.8 U19.14 U25.14 U26.7 U30.8 U31.8 U32.8 U206.16 U208.4 U1000.8 U1002.14 U?.4@137.644,-35.02 U?.11@233.319,-21.865 VR202.3 VR211.3 | length 53.3
  Top Layer w0.2: R32.1@22,41.69 22.03,41.72 23.22,41.72 v2(23.25,41.75) ; C73.1@27.69,25 v2(28.5,25) ; C77.1@27.69,41.75 v2(28.75,41.75) ; U1002.14@30.81,49.8 30.81,51.56 31.06,51.81 C79.1@32.5,51.81 v2(32.5,51) ; U25.14@30.81,58.3 30.81,59.56 31.25,60 32.44,60 C78.1@32.5,60.06 v2(32.5,59) ; v2(34.54,51.05) D87.2@35.35,51.05
  Layer 2 w0.5: v2(28.5,25) 32.5,29 v2(32.5,39.5) 32.5,40.5 ; v2(28.75,41.75) 28.75,41.642 29.396,40.995 29.396,40.854 29.75,40.5 32.5,40.5 ; v2(32.5,59) 32.5,57.25 31.65,56.4 31.65,51.85 v2(32.5,51) 32.5,40.5
P5VD: J2.1 J2.2 Q16.3 R?.2@186.059,-25.615 U22.14 U?.5@159.369,-24.615 U?.5@224.869,-24.615 U?.16@148.094,-16.67
P5VREL: C38.1 C44.1 D31.3 D32.3 D33.3 D36.3 D37.3 D41.3 K1.1 K2.1 K3.1 K4.1 K5.1 K6.2 K7.1 K8.1 K9.2 K10.1 K11.1 K12.1 Q16.4 R125.1 U18.3
  other v1: -21.115,54.295 -20.015,54.295 -18.915,54.295 -17.815,54.295 -16.715,54.295 -15.615,54.295 -21.115,55.395 -20.015,55.395 -18.915,55.395 -17.815,55.395 -16.715,55.395 -15.615,55.395 -21.115,56.495 -20.015,56.495 -18.915,56.495 -17.815,56.495 -16.715,56.495 -15.615,56.495 -21.115,57.595 -20.015,57.595 -18.915,57.595 -17.815,57.595 -16.715,57.595 -15.615,57.595 -21.115,58.695 -20.015,58.695 -18.915,58.695 -17.815,58.695 -16.715,58.695 -15.615,58.695
P15VA: C12.1 C13.1 C14.1 C20.2 C31.1 C36.1 C56.1 C74.1 D22.2 D23.2 D28.2 D30.2 D38.2 D68.1 D70.1 Q2.3 R34.1 R133.1 R207.1 U8.13 U9.1 U9.2 U15.6 U21.14 U101.8 U203.8 U209.4 U1001.8 | length 5.1
  Top Layer w0.2: v2(28.5,23.25) C74.1@27.69,23.25 27.69,22.31 28.025,21.975 30.05,21.975 ; D22.2@35.35,22.3 v2(36.16,22.3)
P48V: C39.1 C40.1 D231.2 Q17.4 U19.22 U19.23 U20.3 U21.22 U21.23 | length 217.4
  Top Layer w3: U20.3@-113.625,-49 -113.625,-18.125 -94.75,0.75 C40.1@-48,0.75 -55.75,-7 -55.75,-12.49 U19.22@-59.14,-15.88 U19.23@-61.68,-15.88 ; U21.22@-59.14,-37.13 U21.23@-61.68,-37.13 -62.67,-37.13 -66.15,-33.65 -66.15,-27.9 -59.75,-21.5 -56.25,-21.5 -37.5,-2.75 -37.5,3.993 -39.257,5.75 -43,5.75 -39.5,9.25 -32.25,9.25 -31,8 -28.789,8 ; C40.1@-48,0.981 -47.865,0.846 -47.769,0.846 -47.115,1.5 -46.5,1.5 -42.904,5.096
  other v1: -26.885,5.555 -25.785,5.555 -24.685,5.555 -23.585,5.555 -22.485,5.555 -21.385,5.555 -26.885,6.655 -25.785,6.655 -24.685,6.655 -23.585,6.655 -22.485,6.655 -21.385,6.655 -26.885,7.755 -25.785,7.755 -24.685,7.755 -23.585,7.755 -22.485,7.755 -21.385,7.755 -26.885,8.855 -25.785,8.855 -24.685,8.855 -23.585,8.855 -22.485,8.855 -21.385,8.855 -26.885,9.955 -25.785,9.955 -24.685,9.955 -23.585,9.955 -22.485,9.955 -21.385,9.955
PLIMIT: U?.4@142.644,-20.48
PMA: 
PMB: U13.10
PNC: Q18.1
POS/NEG: U13.9 U213.9
POWERBUTTON: D42.3
POWERON: J2.3
ROT-PHA: J1.16 R2.1
ROT-PHB: J1.18 R1.1
ROTKEY: U?.7@245.069,-23.115
ROTPHA: J2.16 U?.8@245.069,-23.615
ROTPHB: J2.18 U?.9@245.069,-24.115
RUN/S\T\O\P\: D82.1 | length 2.9
  Top Layer w0.2: 14.5,60.5 14.55,60.45 D82.1@17.35,60.45
SCL: J2.4 R154.2 U16.2
SDA: J2.6 R155.2 U16.3
SWEEP: R138.2 R146.1 U1001.1 U1001.5 | length 15.1
  Top Layer w0.2: R138.2@20,21.69 20.135,21.69 21.445,23 22.5,23 22.85,22.65 22.85,22.45 23.325,21.975 23.95,21.975 25.775,21.975 27.5,20.25 27.5,20.117 27.617,20 30.025,20 30.05,20.025 31.275,20.025 ; 31.75,22.75 31.75,22.825 32.865,23.94 R146.1@33,23.94
SWEEPSTART: U1002.11 U1002.12 U?.6@245.069,-22.615 | length 4
  Top Layer w0.2: U1002.11@27,49.8 27,48.617 27.367,48.25 28,48.25 28.27,48.52 U1002.12@28.27,49.8
TRACK: U22.5 U22.6 U22.12 U22.13 U?.33
UART-RX: U?.3@222.369,-25.565
UART-TX: U?.3@156.869,-25.565
UPDI: R?.1@208.929,-25.615 U?.1@156.869,-23.665
VC/VD: K6.7 K6.8 K7.3 K9.7 K9.8 K10.3 | length 52.9
  Top Layer w1.5: K9.7@38.81,-62.2 38.96,-62.35 38.96,-63.871 39.839,-64.75 42.871,-64.75 43.75,-63.871 ; K9.8@43.89,-62.2 43.75,-62.34 43.75,-63.871 ; K6.7@60.81,-62.2 60.81,-64.871 ; K6.8@65.89,-62.2 65.74,-62.35 65.74,-64.121 64.861,-65 60.939,-65 60.81,-64.871 ; 43.75,-63.871 45.629,-65.75 59.931,-65.75 60.81,-64.871
  Bottom Layer w1.347: 64.004,-39.25 65.288,-39.25 K7.3@66.9,-37.638
  Bottom Layer w1.5: v2(52.65,-37.638) 52.65,-37.9 54,-39.25 64.004,-39.25
VCA: 
VCB: 
VCD: C27.2 R80.2 R85.2 R90.2 R92.2 R98.2
VREF: R38.1 R111.2 R114.2 R139.2 R141.2 U1000.1 U1000.2 U1000.5
XOUT: JX.1 R31.2
YOUT: JY.1 R118.2
pads on no net: C?.2@245.059,-35.115 D29.2 D31.2 D32.2 D33.2 D36.2 D37.2 D41.2 D42.2 D46.2 D80.2 D81.2 D82.2 D83.2 D84.2 D85.2 D86.2 D?.1@175.469,-23.665 D?.1@234.469,-33.165 D?.2@167.969,-35.065 D?.2@206.969,-35.065 D?.2@216.219,-35.065 D?.2@234.469,-35.065 D?.3@209.269,-34.115 D?.3@236.769,-34.115 HS9.ME1 HS9.ME2 J1.7 J3. J4.3 J4.4 K1.2 K2.2 K3.7 K4.2 K4.3 K4.4 K4.7 K5.2 K5.3 K5.4 K6.1 K6.4 K7.2 K7.7 K8.3 K8.5 K9.1 K9.4 K10.2 K10.7 K11.3 K11.5 K12.3 K12.6 Q?.1@197.469,-33.165 Q?.3@254.769,-34.115 R?.1@123.179,-25.615 R?.1@180.429,-25.615 R?.1@202.429,-35.115 R?.2@194.309,-35.115 R?.2@210.309,-25.615 R?.2@231.309,-35.115 R?.2@249.309,-35.115 SW1.2 SW1.3 SW2.1 SW2.4 SW3.1 SW3.4 SW5.2 SW5.3 SW6.1 SW6.4 SW7.1 SW7.4 SW8.2 SW8.4 SW9.2 SW9.4 SW10.2 SW10.4 SW11.2 SW11.3 SW12.1 SW12.4 SW13.1 SW13.4 SW14.2 SW14.3 SW15.1 SW15.4 SW16.1 SW16.4 SW17.1 SW17.4 SW18.1 SW18.4 SW19.2 SW19.3 SW20.1 SW20.4 U8.6 U8.7 U8.8 U8.9 U8.10 U8.11 U12.1 U12.5 U12.8 U13.6 U13.7 U13.8 U13.11 U13.12 U13.13 U13.14 U13.16 U25.1 U25.2 U25.3 U25.4 U25.5 U25.6 U25.13 U26.1 U26.5 U26.8 U32.5 U32.6 U32.7 U206.11 U206.12 U206.13 U206.14 U213.1 U213.2 U213.6 U213.7 U213.8 U213.10 U213.11 U213.12 U213.13 U213.14 U213.15 U213.16 U?.1@133.669,-18.055 U?.1@166.919,-18.055 U?.1@195.169,-18.055 U?.1@222.369,-23.665 U?.1@227.919,-18.055 U?.1@245.069,-20.115 U?.2@133.669,-19.325 U?.2@166.919,-19.325 U?.2@195.169,-19.325 U?.2@227.919,-19.325 U?.2@245.069,-20.615 U?.3@133.669,-20.595 U?.3@166.919,-20.595 U?.3@195.169,-20.595 U?.3@227.919,-20.595 U?.3@245.069,-21.115 U?.4@133.669,-21.865 U?.4@166.919,-21.865 U?.4@195.169,-21.865 U?.4@213.669,-21.865 U?.5@133.669,-23.135 U?.5@166.919,-23.135 U?.5@213.669,-23.135 U?.5@227.919,-23.135 U?.6@133.669,-24.405 U?.6@159.369,-23.665 U?.6@166.919,-24.405 U?.6@213.669,-24.405 U?.6@224.869,-23.665 U?.6@227.919,-24.405 U?.7@133.669,-25.675 U?.7@166.919,-25.675 U?.7@213.669,-25.675 U?.7@227.919,-25.675 U?.8@139.069,-25.675 U?.8@200.569,-25.675 U?.8@219.069,-25.675 U?.8@233.319,-25.675 U?.9@139.069,-24.405 U?.9@200.569,-24.405 U?.9@219.069,-24.405 U?.9@233.319,-24.405 U?.10@139.069,-23.135 U?.10@200.569,-23.135 U?.10@219.069,-23.135 U?.10@233.319,-23.135 U?.11@139.069,-21.865 U?.11@172.319,-21.865 U?.11@200.569,-21.865 U?.11@219.069,-21.865 U?.12@172.319,-20.595 U?.12@200.569,-20.595 U?.12@219.069,-20.595 U?.12@233.319,-20.595 U?.13@172.319,-19.325 U?.13@200.569,-19.325 U?.13@219.069,-19.325 U?.13@233.319,-19.325 U?.14@172.319,-18.055 U?.14@200.569,-18.055 U?.14@219.069,-18.055 U?.14@233.319,-18.055 U?.14@246.869,-25.915 U?.15@247.369,-25.915 U?.24 U?.25 U?.26 U?.27 U?.28 U?.29 U?.30 U?.41 U?.42 U?.43 U?.44 U?.45
copper on no net:
  other v3: 246.169,-24.815 247.269,-24.815 248.369,-24.815 249.469,-24.815 250.569,-24.815 246.169,-23.715 247.269,-23.715 248.369,-23.715 249.469,-23.715 250.569,-23.715 246.169,-22.615 247.269,-22.615 248.369,-22.615 249.469,-22.615 250.569,-22.615 246.169,-21.515 247.269,-21.515 248.369,-21.515 249.469,-21.515 250.569,-21.515 246.169,-20.415 247.269,-20.415 248.369,-20.415 249.469,-20.415 250.569,-20.415

## Polygon pours and split planes (outlines as drawn)
AGND on Layer 1 "AGND" (solid, remove dead copper, shelved, pour order 0): 4.75,82.75 4.75,-75.25 122.25,-75.25 122.25,82.75

## Silkscreen, mask and mechanical layers (free items; w line width, h text height)
Top Overlay:
  text "CT9084 Curve Tracer" at -102.008,38.188 h7
Bottom Overlay:
  text "https://github.com/vincent-himpe/Resistor-DecadeBox" at 115.672,94.828 h2
Mechanical 2:
  lines w0.05: -121.111,-68.73 -121.111,-66.871 ; -22.303,-73.275 100.7,-73.275 107.774,-73.275 ; -21.686,-73.275 -22.92,-73.275 cw(c-22.92,-72.005) -24.19,-72.005 -24.19,-60.401 ccw(c-25.46,-60.401) -25.46,-59.131 -27.076,-59.131 -28.692,-59.131 ccw(c-28.692,-60.401) -29.962,-60.401 -29.962,-72.005 cw(c-31.232,-72.005) -31.232,-73.275 -32.467,-73.275 -57.498,-73.275 -58.733,-73.275 cw(c-58.733,-72.005) -60.003,-72.005 -60.003,-60.401 ccw(c-61.273,-60.401) -61.273,-59.131 -62.889,-59.131 -64.505,-59.131 ccw(c-64.505,-60.401) -65.775,-60.401 -65.775,-72.005 cw(c-67.045,-72.005) -67.045,-73.275 -68.28,-73.275 -107.774,-73.275 cw(c-107.774,-72.005) -109.044,-72.005 -109.044,-70.495 cw(c-109.044,-70.489) -109.05,-70.489 -109.05,-70 ccw(c-114,-70) -118.95,-70 -121.111,-70 -121.111,81.9 121,81.9 121,55 120,55 ; 92.5,-55 92.5,-34.5 ; 92.5,35 92.5,55 ; 120,-55 ccw(c120.5,-55) 120.5,-55.5 cw(c120.5,-56) 121,-56 ; 120,-34.5 121.125,-34.5 121.125,35 120,35 ; 121,-56.292 121,-56 ; 107.774,-73.275 ccw(c107.774,-73.275) 107.774,-73.275 ; 107.774,-73.275 ccw(c107.774,-72.005) 109.044,-72.005 109.044,-70.495 ccw(c109.044,-70.489) 109.05,-70.489 109.05,-70 cw(c114,-70) 118.95,-70 121,-70 121,-56

## Text inside footprints (layer, text, board x,y; h text height)
C26: Top Overlay "+" at 10.132,0.525 h2 r90
C28: Top Overlay "+" at 10.132,-12.475 h2 r90
C38: Top Overlay "+" at -11.675,116.882 h2 r180
C40: Top Overlay "+" at -46.965,-3.125 h3 r90
C44: Top Overlay "+" at 192.925,39.368 h2
C48: Top Overlay "+" at -30.882,-16.675 h2 r270
C52: Top Overlay "+" at -30.882,-24.925 h2 r270
C56: Top Overlay "+" at -30.882,-35.925 h2 r270
C60: Top Overlay "+" at -30.882,-44.175 h2 r270
D1: Top Overlay "+" at 135.799,69.111 h0.8 r90
D2: Top Overlay "+" at 135.799,64.461 h0.8 r90
D3: Top Overlay "+" at 135.799,78.411 h0.8 r90
D4: Top Overlay "+" at 135.799,73.761 h0.8 r90
D5: Top Overlay "+" at 135.799,59.811 h0.8 r90
D6: Top Overlay "+" at 135.799,45.861 h0.8 r90
D7: Top Overlay "+" at 135.799,41.211 h0.8 r90
D8: Top Overlay "+" at 135.799,55.161 h0.8 r90
D9: Top Overlay "+" at 135.799,50.511 h0.8 r90
D10: Top Overlay "+" at 135.799,83.061 h0.8 r90
D11: Top Overlay "+" at 135.799,110.961 h0.8 r90
D12: Top Overlay "+" at 135.799,115.611 h0.8 r90
D13: Top Overlay "+" at 135.799,120.261 h0.8 r90
D14: Top Overlay "+" at 135.799,106.311 h0.8 r90
D15: Top Overlay "+" at 135.799,92.361 h0.8 r90
D16: Top Overlay "+" at 135.799,87.711 h0.8 r90
D17: Top Overlay "+" at 135.799,101.661 h0.8 r90
D18: Top Overlay "+" at 135.799,97.011 h0.8 r90
D19: Top Overlay "+" at 135.799,36.561 h0.8 r90
D20: Top Overlay "+" at 135.799,27.261 h0.8 r90
D21: Top Overlay "+" at 135.799,31.911 h0.8 r90
D34: Top Assembly "K" at 10.05,-30.55 h1.5 r180
D35: Top Assembly "K" at 10.05,-26.55 h1.5 r180
D40: Top Overlay "+" at 147.569,-71.215 h0.8
D47: Top Overlay "+" at 154.319,-71.215 h0.8
D60: Top Assembly "K" at -25.2,-17.45 h1.5 r270
D63: Top Assembly "K" at -25.2,-25.7 h1.5 r270
D67: Top Assembly "K" at -20.95,-44.95 h1.5 r270
D68: Top Assembly "K" at -20.95,-36.7 h1.5 r270
D70: Top Assembly "K" at -25.2,-36.7 h1.5 r270
D73: Top Assembly "K" at -25.2,-44.95 h1.5 r270
D215: Top Assembly "K" at 10.05,27.2 h1.5 r180
D231: Top Assembly "K" at 10.05,31.2 h1.5 r180
HS9: Top Assembly "MATING SURFACE" at -7.58,-4.841 h1 r90
J1: Mechanical 13 "1" at 193.099,-45.685 h0.3
J2: Mechanical 13 "1" at 125.349,-45.685 h0.3
Q16: Top Assembly "1" at -27.09,58.285 h0.3
Q17: Top Assembly "1" at -15.41,5.965 h0.3 r180
Q25: Top Assembly "1" at -27.34,19.285 h0.3
SW22: Top Assembly "1" at 33.9,60.739 h1; Top Assembly "1" at 33.9,60.739 h1
U8: Top Assembly "1" at 150.525,1.55 h0.3
U12: Top Assembly "1" at 23.55,30.355 h0.3
U13: Top Assembly "1" at 160.825,2.05 h0.3
U14: Top Assembly "1" at 166.8,-26.895 h0.3
U15: Top Assembly "1" at 155.05,-13.395 h0.3
U16: Top Assembly "1" at 24.075,12.777 h0.3
U17: Top Assembly "1" at 49.689,164.033 h0.3
U22: Top Assembly "1" at 235.869,-18.355 h0.3
U25: Top Assembly "1" at 30.51,64.5 h0.3 r270
U26: Top Assembly "1" at 156.919,-61.26 h0.3
U30: Top Assembly "1" at 23.55,7.105 h0.3
U31: Top Assembly "1" at 33.8,7.105 h0.3
U32: Top Assembly "1" at 23.55,-9.145 h0.3
U101: Top Assembly "1" at 183.919,-31.51 h0.3
U203: Top Assembly "1" at 163.3,39.355 h0.3
U206: Top Assembly "1" at 182.075,-21.97 h0.3
U208: Top Assembly "1" at 174.8,-7.645 h0.3
U209: Top Assembly "1" at 151.3,36.355 h0.3
U213: Top Assembly "1" at 31.145,0.7 h0.3 r270
U1000: Top Assembly "1" at 23.55,39.605 h0.3
U1001: Top Assembly "1" at 23.55,21.105 h0.3
U1002: Top Assembly "1" at 30.51,56 h0.3 r270
U?: Top Assembly "1" at 227.119,-18.355 h0.3
U?: Top Assembly "1" at 221.844,-23.99 h0.3
U?: Top Assembly "1" at 212.869,-18.355 h0.3
U?: Top Assembly "1" at 194.369,-18.355 h0.3
U?: Top Assembly "1" at 166.119,-18.355 h0.3
U?: Top Assembly "1" at 156.344,-23.99 h0.3
U?: Top Assembly "1" at 141.919,-16.97 h0.3
U?: Top Assembly "1" at 132.869,-18.355 h0.3
U?: Top Assembly "1" at 136.919,-31.51 h0.3